# Altium PCB PCB.PcbDoc
Units mil, origin at the board's own origin, x right, y up, seen from the top; angles counter-clockwise.
Board outline 2190.71 x 2820 mil, 2 copper layers (Top Layer, Bottom Layer); 75 components, 37 nets, 171 pads, 90 vias.
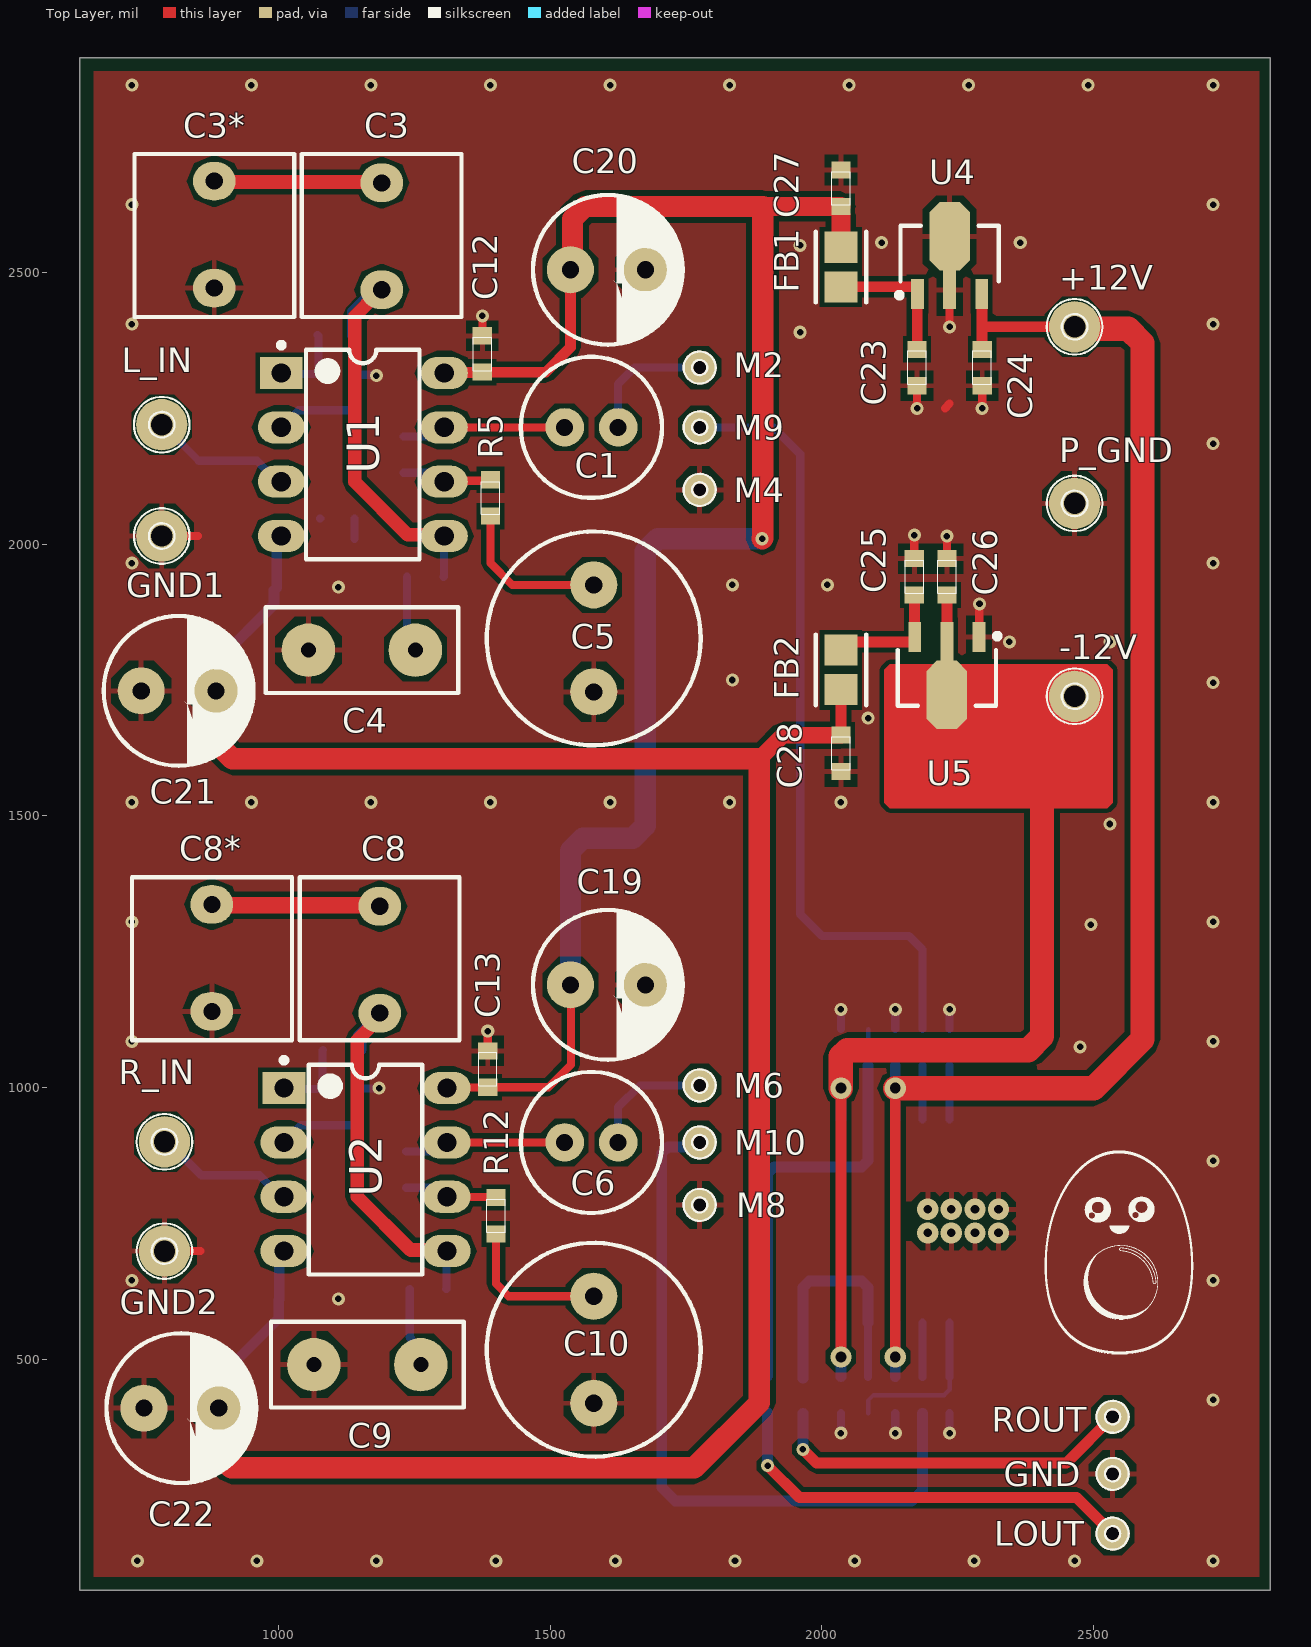
[diagram p0: Top Layer view]
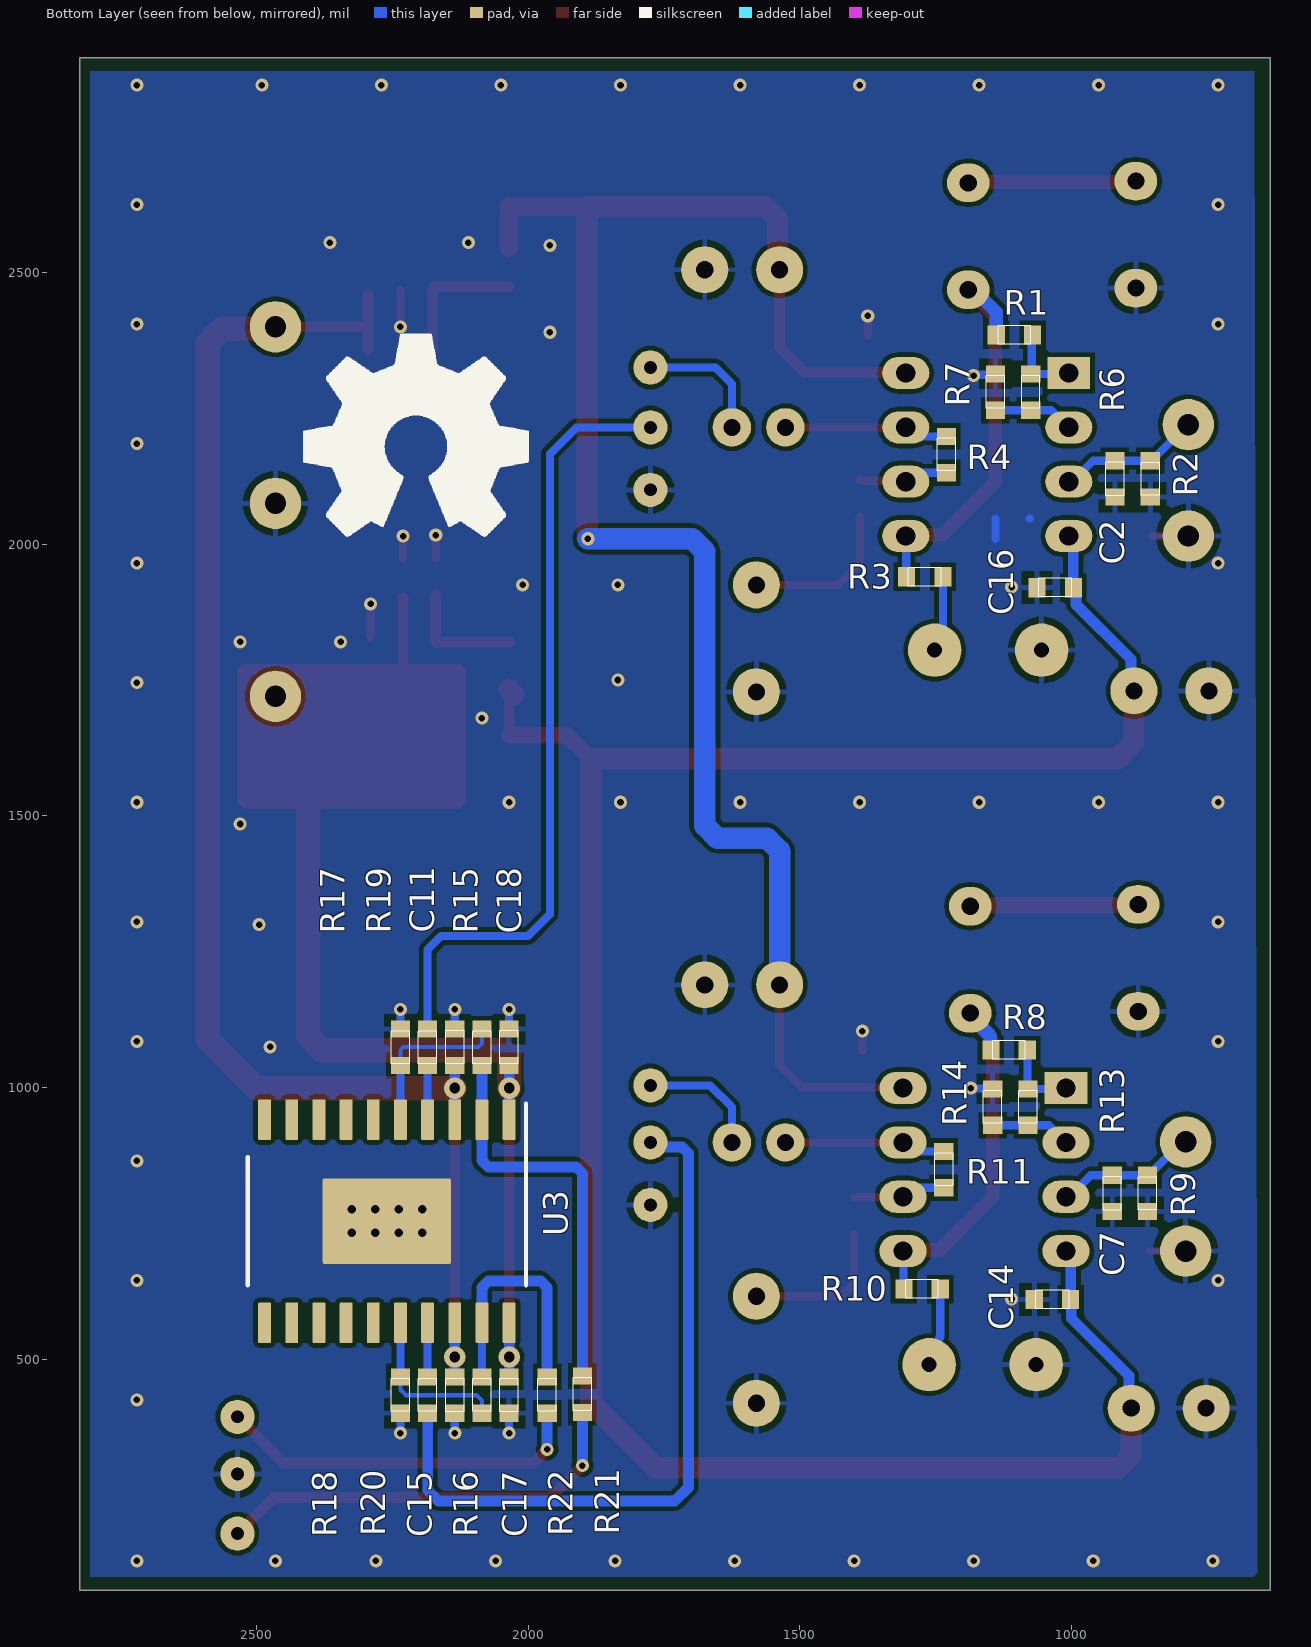
[diagram p1: Bottom Layer view, seen from below]
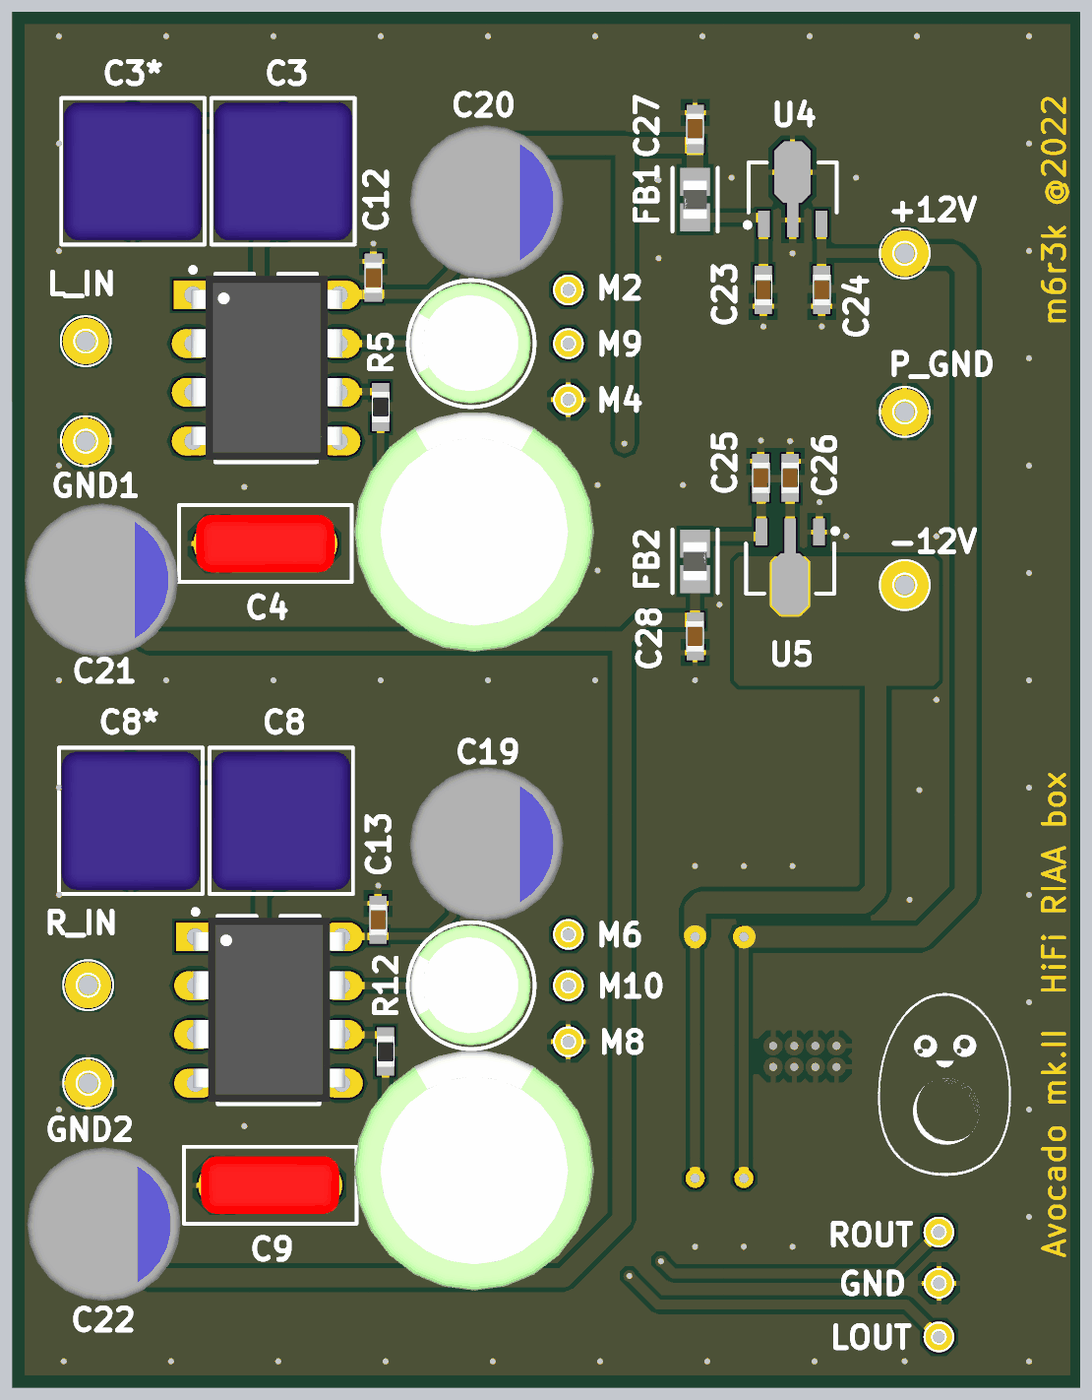
[diagram p2: 3D render of the assembled board from above, using the file's embedded part models]
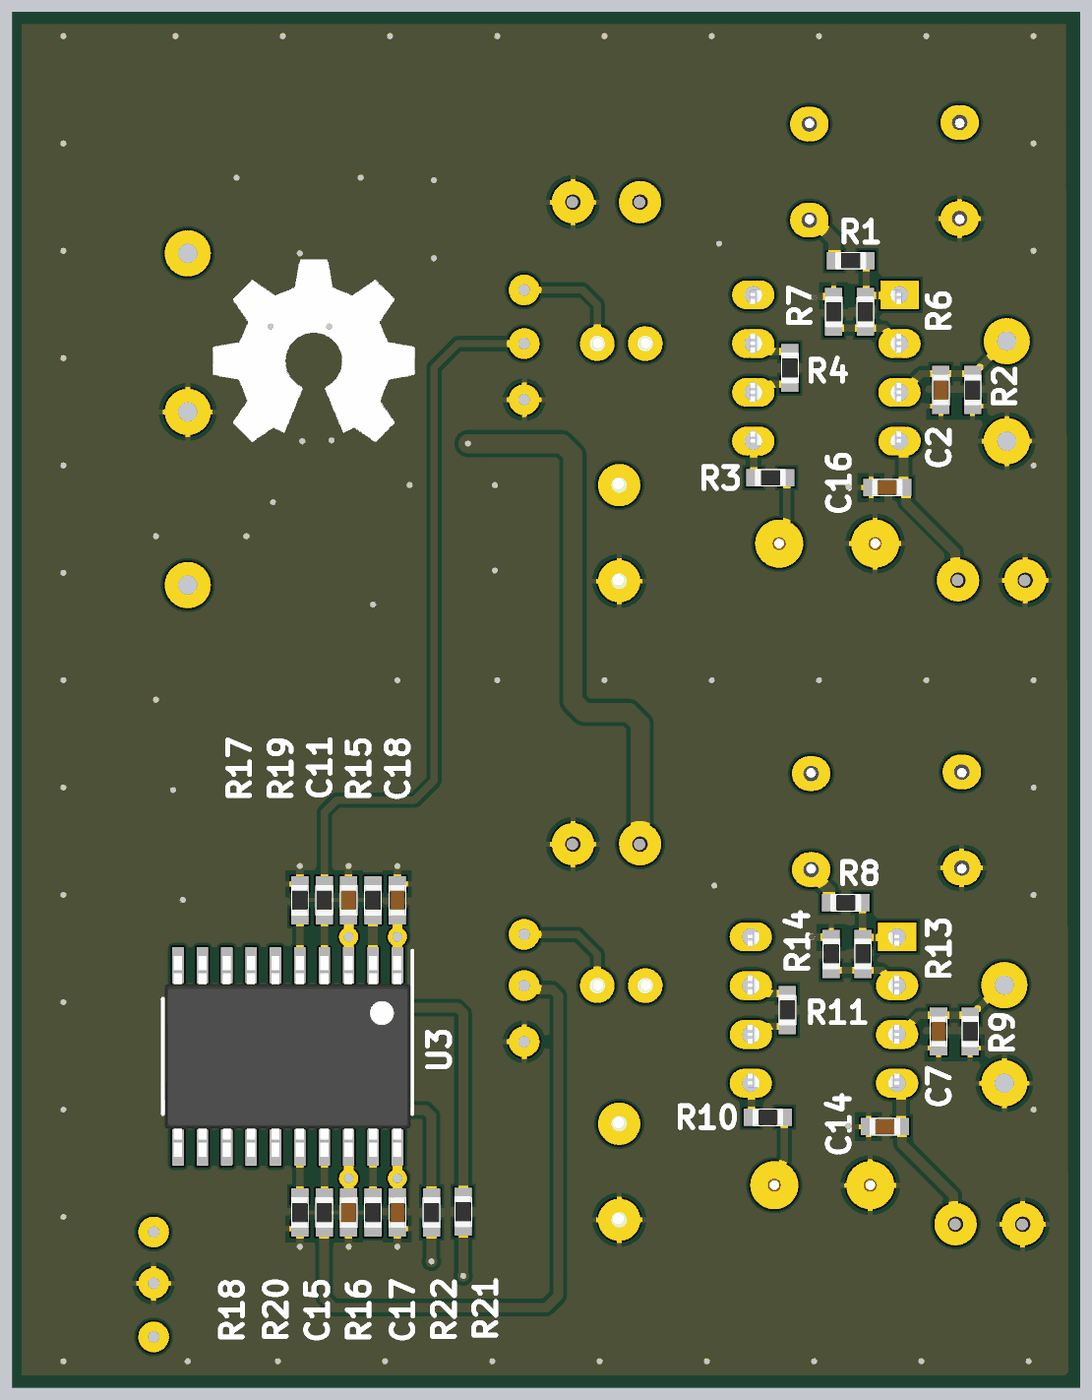
[diagram p3: 3D render of the assembled board from below, using the file's embedded part models]

## Layer stack, top to bottom
Top Solder: solder mask 0.4, Solder Resist, Dk 3.5
Top Layer: signal copper 1.4
Dielectric 1: dielectric 12.6, FR-4, Dk 4.8
Bottom Layer: signal copper 1.4
Bottom Solder: solder mask 0.4, Solder Resist, Dk 3.5

## Board outline
634.46,1461.24 634.46,75 2825,75 2825,2895 634.29,2895

## Design rules (kind name [scope] priority, off if disabled: settings)
Clearance [All] p1: gap=8 ignorepadtopadclearanceinfootprint=FALSE
PolygonConnect [All] p1: connectstyle=Relief reliefconductorwidth=10 reliefentries=4 polygonreliefangle="90 Angle" airgapwidth=12
RoutingVias [All] p1: holewidth=28 width=50 viastyle="Through Hole" minholewidth=28 minwidth=50 maxholewidth=28 maxwidth=50
SolderMaskExpansion [All] p1: expansion=4 istentingtop=FALSE
UnRoutedNet [All] p1: checkbadconnections=TRUE
Width [All] p1: maxlimit=47.24 minlimit=8 preferedwidth=12 minimp=50.000000 maximp=50.000000 favimp=50.000000
29 further rules are at their usual default settings.

## Components (designator, comment, footprint, x,y, rotation, side; value= is the part's Value field where it differs from the comment)
+12V "TP" "Pad 1mm MPoint big" 2465,2400 r0 top
-12V "TP" "Pad 1mm MPoint big" 2465,1720 r180 top
C1 "10uF" UES1V 1526.57,2215 r0 top value=10uF/35V
C2 "120p" C0603 920,2120 r270 bottom
C3 "68n" VISHAY_MKP 1190,2468.15 r90 top
C3* "68n" VISHAY_MKP 881.58,2668.15 r270 top
C4 "100n" WIMA_MKS_2 1251.85,1805 r180 top
C5 "100uF" UES1E 1580,1925 r270 top value=100uF/25V
C6 "10uF" UES1V 1526.57,899 r0 top value=10uF/35V
C7 "120p" C0603 925,805 r270 bottom
C8 "68n" VISHAY_MKP 1186.27,1136.85 r90 top
C8* "68n" VISHAY_MKP 877.2,1336.95 r270 top
C9 "100n" WIMA_MKS_2 1261.85,490 r180 top
C10 "100uF" UES1E 1580,615.85 r270 top value=100uF/25V
C11 "100n" C0603 2135,1074 r90 bottom
C12 "100n" C0603 1375,2350 r90 top
C13 "100n" C0603 1385,1034 r90 top
C14 "100n" C0603 1035,610 r180 bottom
C15 "100n" C0603 2135,434 r270 bottom
C16 "100n" C0603 1030,1920 r180 bottom
C17 "100n" C0603 2035,434 r270 bottom
C18 "100n" C0603 2035,1074 r90 bottom
C19 "150uF" PZF8x9 1537.2,1189 r0 top value=150uF/35V
C20 "150uF" PZF8x9 1537.2,2505 r0 top value=150uF/35V
C21 "150uF" PZF8x9 747.2,1730 r0 top value=150uF/35V
C22 "150uF" PZF8x9 752.2,410 r0 top value=150uF/35V
C23 "100n" C0603 2175,2325 r270 top
C24 "100n" C0603 2295,2325 r270 top
C25 "100n" C0603 2170,1940 r90 top
C26 "100n" C0603 2230,1940 r90 top
C27 "100n" C0603 2035,2655 r90 top
C28 "100n" C0603 2035,1615 r270 top
FB1 "BLM21AG121SN1D" FP-BLM21-0_2-t0_85-e0_5-IPC_A 2035,2510 r270 top
FB2 "BLM21AG121SN1D" FP-BLM21-0_2-t0_85-e0_5-IPC_A 2035,1768.78 r90 top
GND "TP" "Pad0.6mm MPoint big" 2535,289 r0 top
GND1 "TP" "Pad 1mm MPoint big" 785,2015 r0 top
GND2 "TP" "Pad 1mm MPoint big" 790,699 r0 top
L_IN "TP" "Pad 1mm MPoint big" 785,2220 r0 top
LOUT "TP" "Pad0.6mm MPoint big" 2535,179 r0 top
M2 "TP" "Pad0.6mm MPoint big" 1775,2325 r0 top
M4 "TP" "Pad0.6mm MPoint big" 1775,2100 r0 top
M6 "TP" "Pad0.6mm MPoint big" 1775,1004 r0 top
M8 "TP" "Pad0.6mm MPoint big" 1775,784 r0 top
M9 "TP" "Pad0.6mm MPoint big" 1775,2215 r0 top
M10 "TP" "Pad0.6mm MPoint big" 1775,899 r0 top
P_GND "TP" "Pad 1mm MPoint big" 2465,2075 r0 top
R1 "22K" R0603 1105,2385 r180 bottom
R2 "47K" R0603 855,2120 r270 bottom
R3 "3k16" R0603 1270,1940 r180 bottom
R4 "4K7" R0603 1230,2165 r270 bottom
R5 "220R" R0603 1390,2085 r270 top
R6 "2K" R0603 1075,2280 r270 bottom
R7 "100R" R0603 1140,2280 r90 bottom
R8 "22K" R0603 1115,1069 r180 bottom
R9 "47K" R0603 860,805 r270 bottom
R10 "3k16" R0603 1275,629 r180 bottom
R11 "4K7" R0603 1235,849 r270 bottom
R12 "220R" R0603 1400,764 r270 top
R13 "2K" R0603 1080,964 r270 bottom
R14 "100R" R0603 1145,964 r90 bottom
R15 "2K" R0603 2085,1074 r90 bottom
R16 "2K" R0603 2085,434 r270 bottom
R17 "2K" R0603 2235,1074 r90 bottom
R18 "2K" R0603 2235,434 r270 bottom
R19 "100R" R0603 2185,1074 r90 bottom
R20 "100R" R0603 2185,434 r270 bottom
R21 "10R" R0603 1900,435.54 r90 bottom
R22 "10R" R0603 1965,434 r90 bottom
R_IN "TP" "Pad 1mm MPoint big" 790,900 r0 top
ROUT "TP" "Pad0.6mm MPoint big" 2535,394 r0 top
U1 "NJM4580" PDIP300-P8 1155,2165 r0 top
U2 "NJM4580" PDIP300-P8 1160,849 r0 top
U3 "TPA6120A2DWPR" DWP0020B_N 2260,754 r270 bottom
U4 "NJM78L09UA-TE1" SOT-89_N 2235,2535 r90 top
U5 "NJM79L09SU3-TE1" SOT-89_N 2230,1754 r270 top

## Footprints (in the part's own frame and the unit in brackets; to place one, negate y for a bottom-side part, rotate by r counter-clockwise, add the part's x,y. Pads: shape width x height; smd on the part's side, far side on the other; paste and mask are expansions set on the pad)
C0603 [mm]
  rect 0.8x0.9 smd: 1(-0.85,0) 2(0.85,0)
  silkscreen extent -0.77,-0.43 0.77,0.43, body extent -0.8,-0.4 0.8,0.4, height 0.6
DWP0020B_N [mm] "SOP, 20-Leads, Body 13x7.6mm, Pitch 1.27mm, Thermal Pad 2.79x3.81mm, IPC Medium Density"
  rrect17% 1.9x0.6 smd: 1(-4.75,5.715) 2(-4.75,4.445) 3(-4.75,3.175) 4(-4.75,1.905) 5(-4.75,0.635) 6(-4.75,-0.635) 7(-4.75,-1.905) 8(-4.75,-3.175) 9(-4.75,-4.445) 10(-4.75,-5.715) 11(4.75,-5.715) 12(4.75,-4.445) 13(4.75,-3.175) 14(4.75,-1.905) 15(4.75,-0.635) 16(4.75,0.635) 17(4.75,1.905) 18(4.75,3.175) 19(4.75,4.445) 20(4.75,5.715)
  rrect4% 4x6 smd: 21(0,0)
  rrect4% 2.79x3.81 on Bottom Paste: 21(0,0)
  rrect4% 2.79x3.81 on Bottom Solder: 21(0,0)
  silkscreen extent -5.5,-6.5 3,6.5, body extent -5.22,-6.41 5.22,6.41, height 2.65
FP-BLM21-0_2-t0_85-e0_5-IPC_A [mil]
  rect 57.28x61.27 smd paste+0 mask+0: 1(-36.44,0) 2(36.44,0)
  silkscreen extent -65,-46 65,46, body extent -85,-50 85,50, height 10
"Pad0.6mm MPoint big" [mil]
  round 63 hole 23.62: 1(0,0)
  silkscreen extent -29,-29 30,29
"Pad 1mm MPoint big" [mm]
  round 2.4 hole 1: 1(0,0)
  silkscreen extent -1.3,-1.3 1.3,1.3
PDIP300-P8 [mm] "8-Pin Plastic Dual In-Line Package (PDIP)"
  rect 2x1.5 hole 0.9: 1(-3.81,3.81)
  oval 2.2x1.5 hole 0.9: 2(-3.81,1.27) 3(-3.81,-1.27) 4(-3.81,-3.81) 5(3.81,-3.81) 6(3.81,-1.27) 7(3.81,1.27) 8(3.81,3.81)
  silkscreen extent -3.93,-4.9 2.65,5.23, body extent -3.91,-4.78 3.97,4.81, height 4.58
PZF8x9 [mm]
  round 2.2 hole 0.8: 1(0,0) 2(3.5,0)
  silkscreen extent -1.75,-3.5 5.25,3.5, body extent -2.22,-4 5.78,4, height 9.01
R0603 [mm]
  rect 0.8x0.9 smd: 1(-0.85,0) 2(0.85,0)
  silkscreen extent -0.76,-0.43 0.76,0.43, body extent -0.8,-0.4 0.8,0.4, height 0.4
SOT-89_N [mm]
  rect 1.4x0.6 smd: 1(-1.9,1.5) 3(-1.9,-1.5)
  rect 1.8x0.6 smd: 2(-1.7,0)
  oct 3.2x1.9 smd: 2(0.8,0)
  silkscreen extent -2.07,-2.3 1.3,2.47, body extent -1.3,-2.3 1.3,2.3, height 1.6
UES1E [mm]
  round 2.2 hole 0.8: 1(0,0) 2(5,0)
  silkscreen extent -2.5,-5 7.5,5, body extent -3.82,-6.2 8.68,6.3, height 25.01
UES1V [mm]
  round 1.8 hole 0.8: 1(0,0) 2(2.5,0)
  silkscreen extent -2.05,-3.3 4.55,3.3, body extent -1.94,-3.12 4.36,3.17, height 12.51
VISHAY_MKP [mm]
  oval 1.8x2 hole 0.8: 1(0,0) 2(5,0)
  silkscreen extent -1.27,-3.73 6.35,3.74, body extent -1.06,-3.6 6.14,3.6, height 8.5
WIMA_MKS_2 [mm]
  round 2.5 / inner round 2 / far side round 2.5 hole 0.7: 1(0,0) 2(5,0)
  silkscreen extent -2,-2 7,2, body extent -1.1,-1.5 6.1,1.5, height 7.5

## Part data
+12V -12V GND GND1 GND2 L_IN LOUT M2 M4 M6 M8 M9 M10 P_GND R_IN ROUT: library part TP_PCB, "Test Point", Category=Pads_Pins_Measure_Points, Component Type=Mechanical, Main=Mechanical, Stock number=--------
C1 C6: library part EC_THT_106_bipolar, "MUSE bipolar capacitor", Supplier Part Number 1=647-UES1V100MEM1TD, Category="Capacitors THT", Component Type=Capacitors, Main=Capacitors, SMD/THD=THT, Status=A, Supplier 1=Mouser, Supplier 2=Digi-Key, Supplier Part Number 2=493-10846-1-ND
C2 C7: library part CC_0603_NP0_121, "Ceramic Capacitor NP0", Supplier Part Number 1=80-C0603C121F5G, Category="Capacitors CERA SMD", Component Type=Capacitors, ComponentLink1Description=datasheet, Main=Capacitors, SMD/THD=SMD, Status=A, Supplier 1=Mouser, Supplier 2=Farnell, Supplier Part Number 2=2581047
C3 C3* C8 C8*: library part FC_THT_683_1%, "Foil Capacitor Vishay MKP", Supplier Part Number 1=75-MKP1837368011, Category="Capacitors THT", Component Type=Capacitors, ComponentLink1Description=datasheet, Main=Capacitors, SMD/THD=THD, Status=A, Supplier 1=Mouser, Supplier 2=Farnell, Supplier Part Number 2=2528262
C4 C9: library part FC_THT_104, "Foil Capacitor WIMA MKS 2", Supplier Part Number 1=505-MKS2C031001AJI00, Category="Capacitors THT", Component Type=Capacitors, ComponentLink1Description=datasheet, Main=Capacitors, SMD/THD=THD, Status=A, Supplier 1=Mouser
C5 C10: library part EC_THT_107_bipolar, "MUSE bipolar capacitor", Supplier Part Number 1=647-UES1E101MPM, Category="Capacitors THT", Component Type=Capacitors, Main=Capacitors, SMD/THD=THT, Status=A, Supplier 1=Mouser, Supplier 2=Digi-Key, Supplier Part Number 2=493-15025-ND
C11 C12 C13 C14 C15 C16 C17 C18 C23 C24 C25 C26 C27 C28: library part CC_0603_X7R_104, "Ceramic Capacitor X7R", Manufacturer Part Number="100n/50V X7R C0603", Supplier Part Number 1=581-06035C104K4Z2A, Category="Capacitors CERA SMD", Component Type=Capacitors, Main=Capacitors, Part Number="100n/50V X7R C0603", SMD/THD=SMD, Status=A, Supplier 1=Mouser, Supplier 2=Farnell, Supplier Part Number 2=1833843
C19 C20 C21 C22: library part EC_THT_157_polarised, "High temp hybrid capacitor -55/125C", Supplier Part Number 1=232-35PZE150M8X9, Category="Capacitors THT", Component Type=Capacitors, Main=Capacitors, SMD/THD=THT, Status=A, Supplier 1=Mouser, Supplier 2=Digi-Key, Supplier Part Number 2=35PZE150M8X9-ND
FB1 FB2: library part CMP-0686-00716-3, "FERRITE BEAD 120 OHM 0805 1LN", Case Code (Imperial)=0805, Case Code (Metric)=2012, Current Rating=800mA, DC Current=200mA, DC Resistance (DCR)=100mR, Frequency=100MHz, Max Current Rating=1A, Max Operating Temperature=125°C, Min Operating Temperature=-55°C, Package Quantity=1, Resistance=150mR, Tolerance=25%, Case/Package=0805, Core Material=Ferrite, DC Resistance-Max=100mR, Depth=1.25mm, Height=0.85mm, Impedance=120R, Lead Free="Lead Free", Length=2mm, Material=Steel, Max DC Current=200mA, Military Standard=Not, Number of Circuits=1, Number of Lines=1, Number of Pins=2, Packaging="Tape and Reel", Radiation Hardening=No, REACH SVHC="No SVHC", Series=BLM21A, Shielding=Unshielded, Termination=SMD/SMT, Test Frequency=100MHz, Width=1.25mm
R1 R8: library part CR_0603_223, "Resistor 1%, 0.1W, 75V", Manufacturer=Vishay, Part Number="22K R0603", Supplier Part Number 1=RC0603JR-0722K, Category="Resistors SMD", Component Type=Resistors, Main=Resistors, SMD/THD=SMD, Status=A, Supplier 1=TME, Supplier 2=Farnell, Supplier 3=Digi-Key, Supplier Part Number 2=9233547, Supplier Part Number 3=311-22KGRCT-ND
R2 R9: library part CR_0603_473, "Resistor 1%, 0.1W, 75V", Supplier Part Number 1=603-AT0603FRE0747KL, Category="Resistors SMD", Component Type=Resistors, Main=Resistors, SMD/THD=SMD, Status=A, Supplier 1=Mouser, Supplier 2=Digi-Key, Supplier Part Number 2=YAG2129CT-ND
R3 R10: library part CR_0603_3K16, "Resistor 1%, 0.1W, 75V", Supplier Part Number 1=667-ERJ-PB3B3161V, Category="Resistors SMD", Component Type=Resistors, Main=Resistors, SMD/THD=SMD, Status=A, Supplier 1=Mouser, Supplier 2=Digi-Key, Supplier Part Number 2=P20027CT-ND
R4 R11: library part CR_0603_472, "Resistor 1%, 0.1W, 75V", Supplier Part Number 1=603-RC0603FR-074K7L, Category="Resistors SMD", Component Type=Resistors, Main=Resistors, SMD/THD=SMD, Status=A, Supplier 1=Mouser, Supplier 2=Farnell, Supplier 3=TME, Supplier Part Number 2=9238565, Supplier Part Number 3=RC0603FR-074K7
R5 R12: library part CR_0603_221, "Resistor 1%, 0.1W, 75V", Supplier Part Number 1=603-RC0603FR-07220RL, Category="Resistors SMD", Component Type=Resistors, Main=Resistors, SMD/THD=SMD, Status=A, Supplier 1=Mouser, Supplier 2=TME, Supplier 3=Digi-Key, Supplier Part Number 2=RC0603FR-07220R, Supplier Part Number 3=311-220HRCT-ND
R6 R13 R15 R16 R17 R18: library part CR_0603_202, "Resistor 1%, 0.1W, 75V", Supplier Part Number 1=603-RC0603FR-072KL, Category="Resistors SMD", Component Type=Resistors, Main=Resistors, SMD/THD=SMD, Status=A, Supplier 1=Mouser, Supplier 2=Farnell, Supplier 3=TME, Supplier Part Number 2=3495801, Supplier Part Number 3=RC0603FR-072K
R7 R14 R19 R20: library part CR_0603_100, "Resistor 1%, 0.1W, 75V", Supplier Part Number 1=603-RC0603FR-07100RL, Category="Resistors SMD", Component Type=Resistors, Main=Resistors, SMD/THD=SMD, Status=A, Supplier 1=Mouser, Supplier 2=Farnell, Supplier 3=TME, Supplier Part Number 2=9238360, Supplier Part Number 3=RC0603FR-07100R
R21 R22: library part CR_0603_101, "Resistor 1%, 0.1W, 75V", Supplier Part Number 1=652-CR0603FX-10R0ELF, Category="Resistors SMD", Component Type=Resistors, Main=Resistors, SMD/THD=SMD, Status=A, Supplier 1=Mouser, Supplier 2=Farnell, Supplier 3=Digi-Key, Supplier Part Number 2=2321756, Supplier Part Number 3=CR0603-FX-10R0ELFDKR-ND
U1 U2: "General Purpose Amplifier", Supplier 1=Mouser, Supplier Part Number 2=513-NJM4580D
U3: library part TPA6120A, "High Fidelity Stereo Headphone Amplifier, -40 to 85 degC, 20-pin SOP (DWP20), Green (RoHS & no Sb/Br)", Manufacturer="Texas Instruments", Supplier Part Number 1=595-TPA6120A2DWPR, Supply Max(Max)(Volt)=30, Supply Min(Min)(Volt)=10, ComponentLink1Description="Manufacturer URL", ComponentLink1URL=http://www.ti.com/, ComponentLink2Description=Datasheet, ComponentLink2URL=http://www.ti.com/general/docs/lit/getliterature.tsp?genericPartNumber=TPA6120A2&fileType=pdf, ComponentLink3Description="Package Specification", ComponentLink3URL=http://www.ti.com/litv/pdf/mpds032b, DatasheetVersion=SLOS431, Eco-Plan="Green (RoHS & no Sb/Br)", Headphone Channels=Stereo, Load(Min)(ohms)=16, Mounting Technology="Surface Mount", PackageDescription="20-Pin PowerPAD(TM) Plastic Small-Outline Package, Body 12.825 x 7.52 mm, Pitch 1.27 mm", PackageReference=DWP0020B, PackageVersion="4147575/C, 02/2005", PartNumber=TPA6120A2DWPR, PSRR(dB)=75, Special Features=Hi-Fi, SubFamily="Headphone Amplifier", Supplier 1=Mouser, Supplier 2=Digi-Key, Supplier Part Number 2=296-39339-1-ND, Volume Control=Yes
U4: library part 7809, "Positive Voltage Regulator, 9V, 4-Pin SOT-89, Tape and Reel", Manufacturer="Nisshinbo Micro Devices", Manufacturer Part Number=L78L12ACUTR, ComponentLink1Description="Manufacturer URL", ComponentLink1URL=https://www.nisshinbo-microdevices.co.jp/en/, ComponentLink2Description=Datasheet, ComponentLink2URL=https://cz.mouser.com/datasheet/2/294/NJM78L00_E-1917471.pdf, DatasheetVersion=1/02/2011, PackageDescription="3-Pin SOT-89 Package 1.5 mm Pitch, 4.1 mm Lead Span", PackageReference=SOT-89, PackageVersion=2011
U5: library part 7909, "Negative Voltage Regulator, -9V, 4-Pin SOT-89, Tape and Reel", Manufacturer="Nisshinbo Micro Devices", Manufacturer Part Number=L79L12ACUTR, ComponentLink1Description="Manufacturer URL", ComponentLink1URL=https://www.nisshinbo-microdevices.co.jp/en/, ComponentLink2Description=Datasheet, ComponentLink2URL=https://cz.mouser.com/datasheet/2/294/NJM79L00S_E-1859990.pdf, DatasheetVersion=1/07/2009, PackageDescription="3-Pin SOT-89 Package 1.5 mm Pitch, 4.1 mm Lead Span", PackageReference=SOT-89, PackageVersion=2011

## Via types
v1: diameter 24, hole 12, Top Layer to Bottom Layer, tented both sides, 77 vias
v2: diameter 39.37, hole 15.75, Top Layer to Bottom Layer, 8 vias
v3: diameter 39.37, hole 19.68, Top Layer to Bottom Layer, 4 vias
v4: diameter 24, hole 12, Top Layer to Bottom Layer, tented top, 1 vias

## Nets (pads, with @x,y where several pads share a name; then routed paths per layer and width w, separated by ;. In a path a pad name is that pad's centre, name@x,y a point inside that pad or via, vN(x,y) a via of type N, cw(c..) or ccw(c..) an arc to the next point about the centre after c; other vN are vias at no path point)
+9V: C12.1 C13.1 C19.1 C20.1 C27.1 FB1.1 U1.8 U2.8 | length 3207.8
  Top Layer w15: U1.8 U1.8@1305.77,2315.77 ; U2.8 1310.77,999.77 1384.23,999.77 C13.1 1496.54,1000.54 1537.89,1041.89 C19.1@1537.89,1189.69 ; C12.1@1374.23,2315.77 C12.1
  Top Layer w19.68: U1.8@1305.77,2315.77 C12.1@1374.23,2315.77 ; C12.1 1491.54,2316.54 1537.2,2362.2 C20.1
  Top Layer w30: 2035,2605 C27.1
  Top Layer w35: 1890.86,2620.86 1891.49,2621.49 C27.1@2034.78,2621.49 ; FB1.1 2035,2605
  Top Layer w39.37: C19.1 C19.1@1537.89,1189.69 ; C20.1 1540.97,2508.77 1540.97,2598.43 1564.03,2621.49 1891.49,2621.49 ; v4(1890,2010) 1890.86,2010.86 1890.86,2620.86
  Bottom Layer w39.37: C19.1 1537.2,1435.94 1560.27,1459 1651.94,1459 1675,1482.06 1675,1986.94 1698.06,2010 v4(1890,2010)
+12V: +12V.1 C11.1 C15.1 C24.1 U3.3 U3.18 U4.3 | length 2877.5
  Top Layer w19.68: v3(2135,504) v3(2135,999) ; U4.3 2294.53,2459.72 2294.53,2400 ; C24.1 2294.53,2358.94 2294.53,2400 ; +12V.1 2294.53,2400
  Top Layer w45: v3(2135,999) 2500,999 2590,1089 2590,2370.2 2563.64,2396.56 2468.44,2396.56 +12V.1
  Bottom Layer w19.68: C15.1 v3(2135,504) U3.18 ; U3.3 v3(2135,999) C11.1
-9V: C14.2 C16.2 C21.2 C22.2 C28.1 FB2.1 U1.4 U2.4 | length 4402.8
  Top Layer w15: C21.2 C21.2@885,1745 ; C22.2 C22.2@890,416.65
  Top Layer w19.68: FB2.1@2026.05,1723.38 2035,1714.43 C28.1
  Top Layer w23.62: U2.4@999,699 U2.4 ; U1.4@1000.81,2015 U1.4
  Top Layer w30: 1885,1605 1928.46,1648.46 C28.1
  Top Layer w39.37: C21.2 885,1635 915,1605 1885,1605 1885,420 1765.23,300.23 913.06,300.23 890,323.29 C22.2 ; FB2.1@2026.05,1723.38 FB2.1
  Bottom Layer w15: U1.4@996.54,2006.54 U1.4
  Bottom Layer w19.68: C21.2 890.66,1735.66 890.66,1787.97 991.68,1889 991.68,1915.15 C16.2 U1.4@996.54,2006.54 ; C22.2 894.32,414.32 894.32,469.32 1000.34,575.34 1000.34,608.81 C14.2 1001.54,690.54 U2.4
-12V: -12V.1 C17.1 C18.1 C26.1 U3.1 U3.20 U5.2 | length 2161.2
  Top Layer w19.68: v3(2035,504) v3(2035,999) ; U5.2@2230,1722.5 2230,1820.93 C26.1@2230,1901.54
  Top Layer w45: v3(2035,999) 2035,1057.47 2046.53,1069 2380,1069 2405,1094 2405,1697.64 ; U5.2@2230,1722.5 2231.25,1721.25 2463.75,1721.25 -12V.1 -12V.1@2460.13,1720
  Bottom Layer w19.68: C17.1 v3(2035,504) U3.20 ; U3.1 v3(2035,999) C18.1
GND: C2.2 C3*.2 C4.2 C5.2 C7.2 C8*.2 C9.2 C10.2 C11.2 C12.2 C13.2 C14.1 C15.2 C16.1 C17.2 C18.2 C19.2 C20.2 C21.1 C22.1 C23.2 C24.2 C25.2 C26.2 C27.2 C28.2 GND1.1 GND2.1 GND.1 M4.1 M8.1 P_GND.1 R2.2 R7.2 R9.2 R14.2 R17.2 R18.2 U3.21@2260,754 U4.2 U5.1 | length 854.9
  Top Layer w15: GND1.1 851.54,2015 ; GND2.1 856.54,699 ; C12.2 v1(1375,2420) ; C13.2 v1(1385,1104) ; C25.2 v1(2170,2016.54) ; v1(2175,2250) C23.2 ; 2226.21,2250 2235,2258.79 ; C26.2 v1(2230,2015) ; v1(2235,2400) U4.2@2235,2468.07 ; U5.1 2289.53,1829.28 2289.53,1889.53 v1(2290,1890) ; v1(2295,2250) C24.2
  Bottom Layer w15: 1076.38,2047.36 1076.79,2046.95 ; 1139.59,2046.95 1140,2046.54 1140,2010 ; R7.2 1141.74,2311.72 1178.28,2311.72 v1(1180,2310) ; R14.2 1145.77,998.23 1184.23,998.23 v1(1185,999) ; v1(2035,364) C17.2 ; C18.2 v1(2035,1144) ; v1(2135,364) C15.2 ; C11.2 v1(2135,1144) ; v1(2235,364) R18.2 ; R17.2 v1(2235,1144)
  other v1: 740,129 960,129 1180,129 1400,129 1620,129 1840,129 2060,129 2280,129 2465,129 2720,129 2720,425 1110.16,611.08 730,645 2720,645 2720,865 2475,1075 730,1085 2720,1085 2495,1300 730,1305 2720,1305 2530,1485 730,1525 950,1525 1170,1525 1390,1525 1610,1525 1830,1525 2035,1525 2720,1525 2085,1680 2720,1745 1835,1750 2345,1820 2530,1820 1110.16,1921.08 1835,1925 2010,1925 730,1965 2720,1965 2720,2185 1960,2390 730,2405 2720,2405 1960,2550 2110,2555 2365,2555 730,2625 2720,2625 730,2845 950,2845 1170,2845 1390,2845 1610,2845 1830,2845 2050,2845 2270,2845 2490,2845 2720,2845
  other v2: 2195.04,732.35 2238.35,732.35 2281.65,732.35 2324.96,732.35 2195.04,775.65 2238.35,775.65 2281.65,775.65 2324.96,775.65
NetC1_1: C1.1 R4.1 U1.7 | length 303.4
  Top Layer w15: U1.7 C1.1
  Bottom Layer w15: R4.1 1276.54,2198.46 1293.08,2215 U1.7
NetC1_2: C1.2 M2.1 | length 242.4
  Bottom Layer w15: C1.2 1625,2295 1655,2325 M2.1
NetC2_1: C2.1 L_IN.1 R2.1 U1.3 | length 264
  Bottom Layer w15: L_IN.1 786.5,2220 853.03,2153.46 R2.1 C2.1 960.22,2153.46 998.68,2115 U1.3 U1.3@1005.36,2114.64
NetC3*_1: C3*.1 C3.2 | length 299.7
  Top Layer w25: C3*.1 883.15,2666.57 1178.43,2666.57 C3.2@1180,2665
NetC3_1: C3.1 R1.1 R3.1 U1.5 | length 752.1
  Top Layer w25: C3.1@1180,2468.15 1180,2459.68 1140,2419.68 1140,2115 1237.97,2017.03 1302.97,2017.03 U1.5
  Bottom Layer w15: R3.1 1304.23,1940.77 1304.23,2014.23 U1.5
  Bottom Layer w25: R1.1 1138.46,2426.61 C3.1@1180,2468.15
NetC4_1: C4.1 R3.2 | length 141.3
  Bottom Layer w15: R3.2 1236.54,1820.32 C4.1
NetC5_1: C5.1 R5.2 | length 293.1
  Top Layer w15: R5.2 1390,1965 1430,1925 C5.1
NetC6_1: C6.1 R11.1 U2.7 | length 298.4
  Top Layer w15: U2.7 C6.1
  Bottom Layer w15: R11.1 1281.54,882.46 1298.08,899 U2.7
NetC6_2: C6.2 M6.1 | length 231.6
  Bottom Layer w15: C6.2 1625,964 1665,1004 M6.1
NetC7_1: C7.1 R9.1 R_IN.1 U2.3 | length 262.9
  Bottom Layer w15: R_IN.1 796.5,900 858.03,838.46 R9.1 C7.1 965.22,838.46 1004.68,799 U2.3 U2.3@1010.77,798.23
NetC8*_1: C8*.1 C8.2 | length 302.6
  Top Layer w30: C8*.1@885,1336.85 886.57,1335.28 1184.69,1335.28 C8.2
NetC8_1: C8.1 R8.1 R10.1 U2.5 | length 715.5
  Top Layer w25: C8.1 1186.27,1128.38 1145,1087.11 1145,799 1242.97,701.03 1307.97,701.03 U2.5
  Bottom Layer w15: R10.1 1309.23,629.77 1309.23,698.23 U2.5
  Bottom Layer w25: R8.1 1149.21,1069.75 1149.21,1094.72 1186.27,1131.77 C8.1
NetC9_1: C9.1 R10.2 | length 147.4
  Bottom Layer w15: R10.2 1241.54,540.5 1245.89,536.15 1245.89,505.96 C9.1
NetC10_1: C10.1 R12.2 | length 281.1
  Top Layer w15: R12.2 1400,639 1423.15,615.85 C10.1
NetC23_1: C23.1 FB1.2 U4.1 | length 255.3
  Top Layer w19.68: FB1.2 2173.98,2473.56 2175.94,2471.59 U4.1 2175.47,2459.72 2175.47,2358.94 C23.1
NetC25_1: C25.1 FB2.2 U5.3 | length 222.8
  Top Layer w19.68: FB2.2@2033.94,1820 2168.98,1820 2170.94,1821.97 U5.3 2170.47,1829.28 2170.47,1906.06 C25.1
NetLOUT_1: LOUT.1 R21.1 | length 784.8
  Top Layer w20: v1(1900,304) 1958.77,245.23 2468.77,245.23 LOUT.1
  Bottom Layer w20: v1(1900,304) R21.1
NetM9_1: M9.1 R19.2 | length 1450.9
  Bottom Layer w15: M9.1 1911.21,2215 1960,2166.21 1960,1319 2000,1279 2160,1279 2185,1254 R19.2
NetM10_1: M10.1 R20.2 | length 1333.5
  Bottom Layer w19.68: M10.1 1766.71,890.71 1716.71,890.71 1705,879 1705,264 1730,239 2165,239 2185,259 R20.2
NetR1_2: R1.2 R6.1 U1.1 | length 143.6
  Bottom Layer w15: U1.1 1006.54,2313.46 R6.1 1073.27,2315.2 1073.27,2383.27 R1.2
NetR4_2: R4.2 R5.1 U1.6 | length 168.3
  Top Layer w15: U1.6 1306.73,2116.73 1388.27,2116.73 R5.1
  Bottom Layer w15: R4.2 1276.54,2131.54 1293.08,2115 U1.6
NetR6_2: R6.2 R7.1 U1.2 | length 148.1
  Bottom Layer w15: U1.2 1036.54,2246.54 R6.2 R7.1
NetR8_2: R8.2 R13.1 U2.1 | length 142.8
  Bottom Layer w15: U2.1 1011.54,997.46 R13.1 1080.77,998.23 1080.77,1068.23 R8.2
NetR11_2: R11.2 R12.1 U2.6 | length 172.5
  Top Layer w15: U2.6 1310.77,798.23 1399.23,798.23 R12.1
  Bottom Layer w15: R11.2 1281.54,815.54 1298.08,799 U2.6
NetR13_2: R13.2 R14.1 U2.2 | length 148.1
  Bottom Layer w15: U2.2 1041.54,930.54 R13.2 R14.1
NetR15_1: R15.1 R21.2 U3.2 | length 742.8
  Bottom Layer w20: R21.2 1900,842.28 1911.72,854 2073.28,854 2085,865.72 U3.2 R15.1
NetR15_2: R15.2 R17.1 U3.5 | length 309.6
  Bottom Layer w8: R15.2 2085,1080.71 2091.22,1074.49 2229.51,1074.49 2235,1069 R17.1
  Bottom Layer w15: U3.5 R17.1
NetR16_1: R16.1 R22.2 U3.19 | length 461.8
  Bottom Layer w15: R16.1 U3.19
  Bottom Layer w20: R22.2@1965,465.05 1965,632.28 1976.72,644 2073.28,644 2085,632.28 U3.19
NetR16_2: R16.2 R18.1 U3.16 | length 304.7
  Bottom Layer w8: R16.2 2085,424 2095,434 2225,434 2235,444 R18.1
  Bottom Layer w15: R18.1 U3.16
NetR19_1: R19.1 U3.4 | length 99.5
  Bottom Layer w15: U3.4 R19.1
NetR20_1: R20.1 U3.17 | length 99.5
  Bottom Layer w15: R20.1 U3.17
NetR22_1: R22.1 ROUT.1 | length 682.1
  Top Layer w20: v1(1965,334) 1990,309 2450,309 ROUT.1
  Bottom Layer w20: v1(1965,334) R22.1
pads on no net: U3.6 U3.7 U3.8 U3.9 U3.10 U3.11 U3.12 U3.13 U3.14 U3.15 U3.21@2260,754

## Polygon pours and split planes (outlines as drawn)
GND on Bottom Layer "GND_L02_P001" (solid, remove dead copper, pour order 1): 663.82,2870 2806.07,2870 2806.07,100 658.27,100
GND on Top Layer "GND_L01_P000" (solid, pour order 0): 660.07,100 2805,100 2805,2870 660.07,2870

## Other copper
Top Layer:
  region net -12V: 2125,1779 2525,1779 2535.1,1768.9 2535.1,1524.07 2525,1514 2125,1514 2114.93,1524.07 2114.93,1768.93

## Silkscreen, mask and mechanical layers (free items; w line width, h text height)
Top Overlay:
  drawing of 35 lines, arcs and shapes, not listed
Bottom Overlay:
  region: 1431 vertices and 0 holes, not listed, extent 1999.1,2013.31 2413.67,2387.08
Top Solder:
  text "m6r3k @2022" at 2793,2247 h45 r90
  text "Avocado mk.II  HiFi RIAA box" at 2793,337 h45 r90